# Altium PCB PLC光电隔离模块NPN-16路.PcbDoc
Units mm, origin at the board's own origin, x right, y up, seen from the top; angles counter-clockwise.
Board outline 174.5 x 72.01 mm, 2 copper layers (Top Layer, Bottom Layer); 122 components, 99 nets, 314 pads, 49 vias.
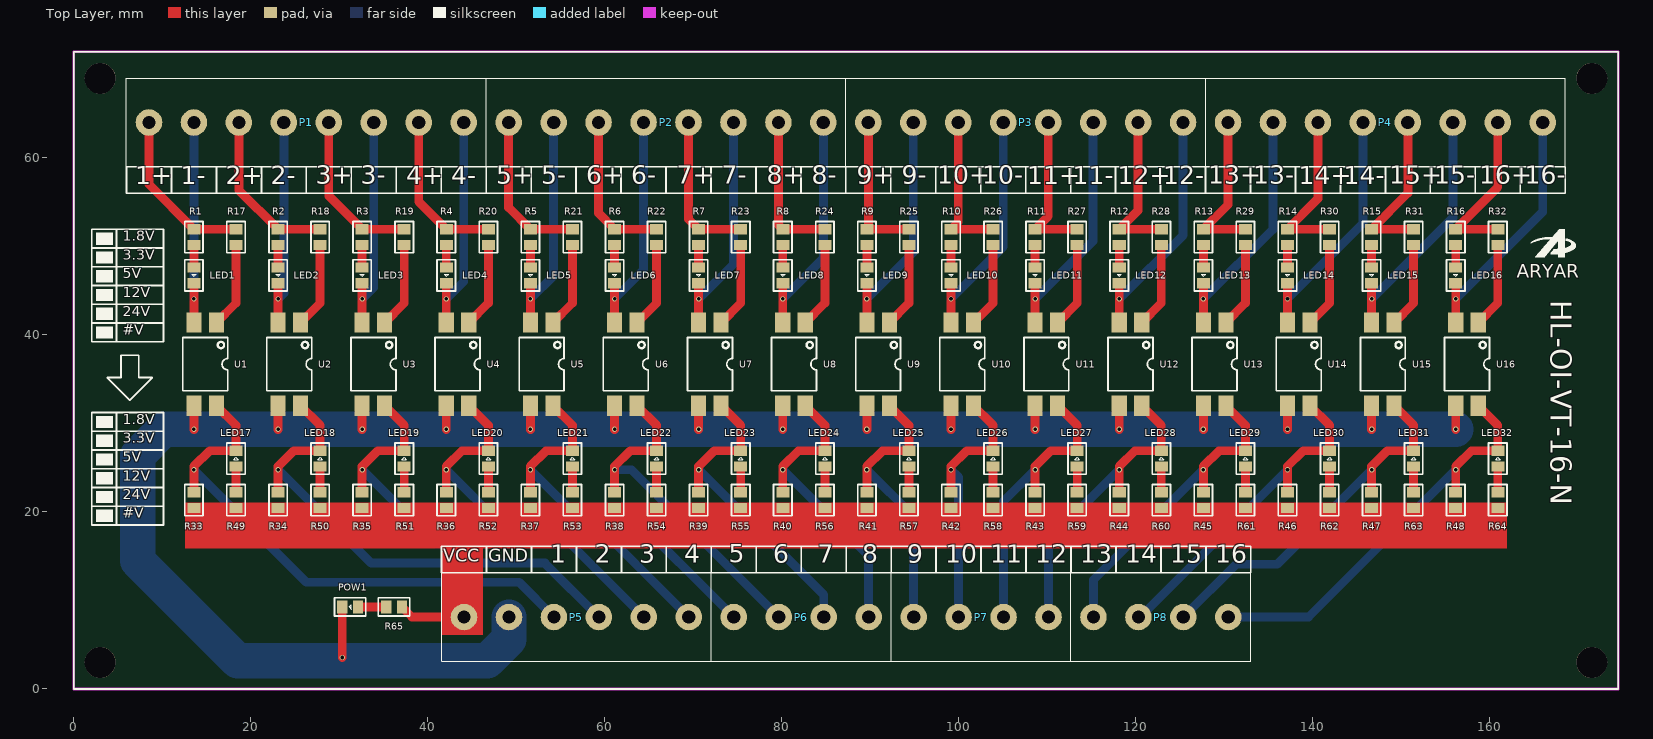
[diagram p0: Top Layer view]
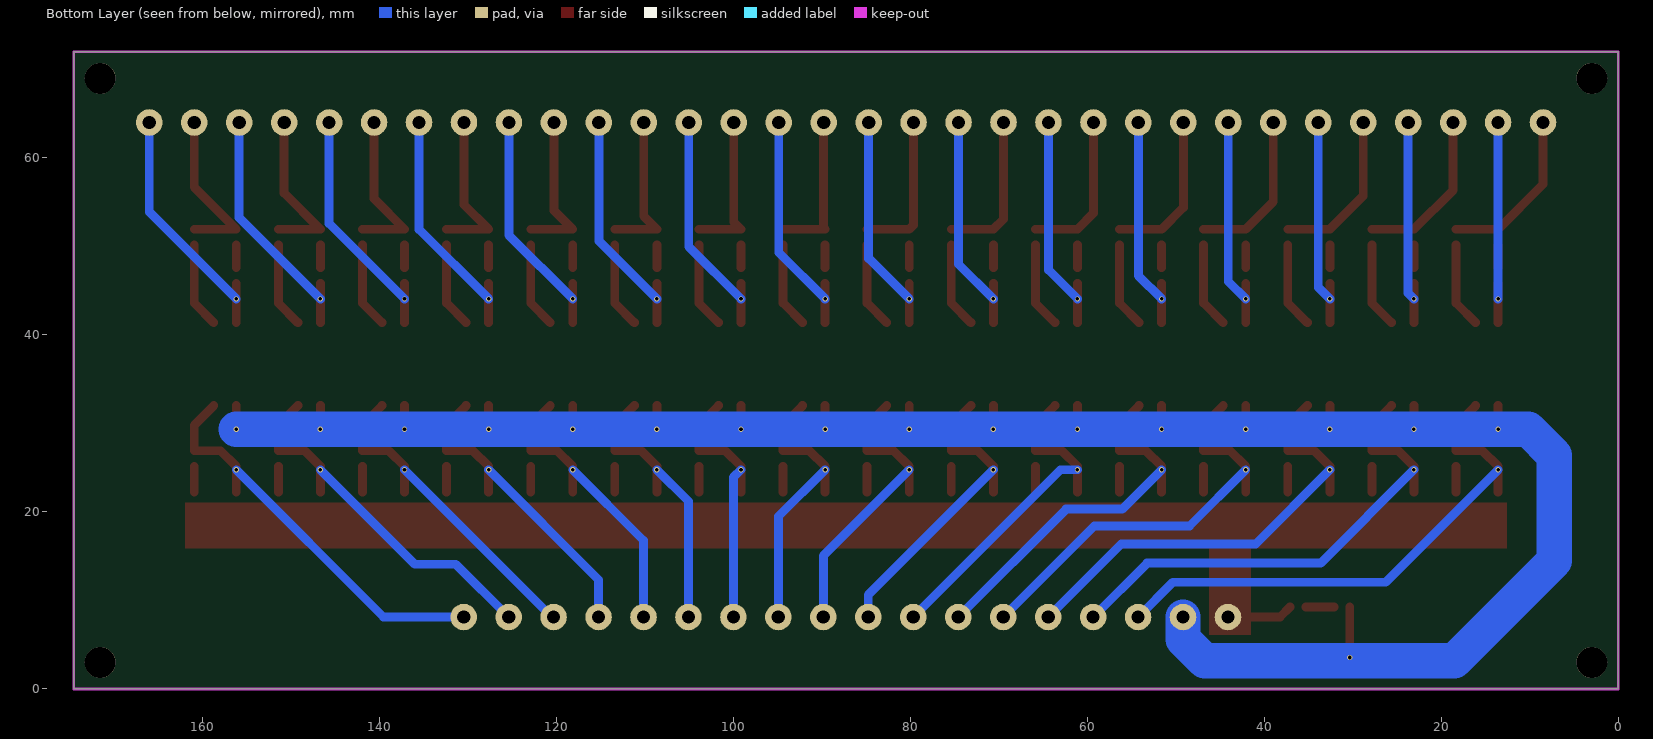
[diagram p1: Bottom Layer view, seen from below]

## Layer stack, top to bottom
Top Solder: solder mask 0.0102, Solder Resist, Dk 3.5
Top Layer: signal copper 0.0356
Dielectric 1: dielectric 0.32, FR-4, Dk 4.8
Bottom Layer: signal copper 0.0356
Bottom Solder: solder mask 0.0102, Solder Resist, Dk 3.5

## Board outline
0,0 0,72.009 174.498,72.009 174.498,0

## Design rules (kind name [scope] priority, off if disabled: settings)
Clearance [All] p1: gap=0.2
PolygonConnect [All] p1: connectstyle=Relief reliefconductorwidth=0.254 reliefentries=4 polygonreliefangle="90 Angle" airgapwidth=0.254
RoutingVias [All] p1: holewidth=0.6 width=1 viastyle="Through Hole" minholewidth=0.711 minwidth=1.27 maxholewidth=0.711 maxwidth=1.27
SilkToSilkClearance [All] p1: silktosilkclearance=0.001
SilkToSolderMaskClearance [IsPad] p1: minsilkscreentomaskgap=0.001 clearancetoexposedcopper=TRUE
SolderMaskExpansion [All] p1: expansion=0.102
Width [All] p1: maxlimit=4 minlimit=0.2 preferedwidth=1 minimp=50.000000 maximp=50.000000 favimp=50.000000
28 further rules are at their usual default settings.

## Components (designator, comment, footprint, x,y, rotation, side; value= is the part's Value field where it differs from the comment)
LED1 "0805" LC-0805 13.589,46.736 r270 top
LED2 "0805" LC-0805 23.094,46.736 r270 top
LED3 "0805" LC-0805 32.598,46.736 r270 top
LED4 "0805" LC-0805 42.103,46.736 r270 top
LED5 "0805" LC-0805 51.607,46.736 r270 top
LED6 "0805" LC-0805 61.112,46.736 r270 top
LED7 "0805" LC-0805 70.616,46.736 r270 top
LED8 "0805" LC-0805 80.121,46.736 r270 top
LED9 "0805" LC-0805 89.625,46.736 r270 top
LED10 "0805" LC-0805 99.13,46.736 r270 top
LED11 "0805" LC-0805 108.634,46.736 r270 top
LED12 "0805" LC-0805 118.139,46.736 r270 top
LED13 "0805" LC-0805 127.643,46.736 r270 top
LED14 "0805" LC-0805 137.148,46.736 r270 top
LED15 "0805" LC-0805 146.652,46.736 r270 top
LED16 "0805" LC-0805 156.157,46.736 r270 top
LED17 "0805" LC-0805 18.341,26.035 r90 top
LED18 "0805" LC-0805 27.846,26.035 r90 top
LED19 "0805" LC-0805 37.35,26.035 r90 top
LED20 "0805" LC-0805 46.855,26.035 r90 top
LED21 "0805" LC-0805 56.359,26.035 r90 top
LED22 "0805" LC-0805 65.864,26.035 r90 top
LED23 "0805" LC-0805 75.368,26.035 r90 top
LED24 "0805" LC-0805 84.873,26.035 r90 top
LED25 "0805" LC-0805 94.377,26.035 r90 top
LED26 "0805" LC-0805 103.882,26.035 r90 top
LED27 "0805" LC-0805 113.386,26.035 r90 top
LED28 "0805" LC-0805 122.891,26.035 r90 top
LED29 "0805" LC-0805 132.395,26.035 r90 top
LED30 "0805" LC-0805 141.9,26.035 r90 top
LED31 "0805" LC-0805 151.404,26.035 r90 top
LED32 "0805" LC-0805 160.909,26.035 r90 top
P1 "Header 8" 128单排8位端子5.08 8.509,64.008 r0 top
P2 "Header 8" 128单排8位端子5.08 49.149,64.008 r0 top
P3 "Header 8" 128单排8位端子5.08 89.789,64.008 r0 top
P4 "Header 8" 128单排8位端子5.08 130.429,64.008 r0 top
P5 "Header 6" "128单排6位端子5.08 - 反向" 44.105,8.128 r0 top
P6 "Header 4" 128单排4位端子5.08 74.585,8.128 r0 top
P7 "Header 4" 128单排4位端子5.08 94.905,8.128 r0 top
P8 "Header 4" 128单排4位端子5.08 115.225,8.128 r0 top
POW1 "0805" LC-0805 31.242,9.271 r180 top
R1 "330R" LC-0805_L 13.589,51.054 r90 top
R2 "330R" LC-0805_L 23.094,51.054 r90 top
R3 "330R" LC-0805_L 32.598,51.054 r90 top
R4 "330R" LC-0805_L 42.103,51.054 r90 top
R5 "330R" LC-0805_L 51.607,51.054 r90 top
R6 "330R" LC-0805_L 61.112,51.054 r90 top
R7 "330R" LC-0805_L 70.616,51.054 r90 top
R8 "330R" LC-0805_L 80.121,51.054 r90 top
R9 "330R" LC-0805_L 89.625,51.054 r90 top
R10 "330R" LC-0805_L 99.13,51.054 r90 top
R11 "330R" LC-0805_L 108.634,51.054 r90 top
R12 "330R" LC-0805_L 118.139,51.054 r90 top
R13 "330R" LC-0805_L 127.643,51.054 r90 top
R14 "330R" LC-0805_L 137.148,51.054 r90 top
R15 "330R" LC-0805_L 146.652,51.054 r90 top
R16 "330R" LC-0805_L 156.157,51.054 r90 top
R17 "331 0805" LC-0805_L 18.341,51.054 r270 top
R18 "331 0805" LC-0805_L 27.846,51.054 r270 top
R19 "331 0805" LC-0805_L 37.35,51.054 r270 top
R20 "331 0805" LC-0805_L 46.855,51.054 r270 top
R21 "331 0805" LC-0805_L 56.359,51.054 r270 top
R22 "331 0805" LC-0805_L 65.864,51.054 r270 top
R23 "331 0805" LC-0805_L 75.368,51.054 r270 top
R24 "331 0805" LC-0805_L 84.873,51.054 r270 top
R25 "331 0805" LC-0805_L 94.377,51.054 r270 top
R26 "331 0805" LC-0805_L 103.882,51.054 r270 top
R27 "331 0805" LC-0805_L 113.386,51.054 r270 top
R28 "331 0805" LC-0805_L 122.891,51.054 r270 top
R29 "331 0805" LC-0805_L 132.395,51.054 r270 top
R30 "331 0805" LC-0805_L 141.9,51.054 r270 top
R31 "331 0805" LC-0805_L 151.404,51.054 r270 top
R32 "331 0805" LC-0805_L 160.909,51.054 r270 top
R33 "10K 0805" LC-0805_L 13.589,21.336 r270 top
R34 "10K 0805" LC-0805_L 23.094,21.336 r270 top
R35 "10K 0805" LC-0805_L 32.598,21.336 r270 top
R36 "10K 0805" LC-0805_L 42.103,21.336 r270 top
R37 "10K 0805" LC-0805_L 51.607,21.336 r270 top
R38 "10K 0805" LC-0805_L 61.112,21.336 r270 top
R39 "10K 0805" LC-0805_L 70.616,21.336 r270 top
R40 "10K 0805" LC-0805_L 80.121,21.336 r270 top
R41 "10K 0805" LC-0805_L 89.625,21.336 r270 top
R42 "10K 0805" LC-0805_L 99.13,21.336 r270 top
R43 "10K 0805" LC-0805_L 108.634,21.336 r270 top
R44 "10K 0805" LC-0805_L 118.139,21.336 r270 top
R45 "10K 0805" LC-0805_L 127.643,21.336 r270 top
R46 "10K 0805" LC-0805_L 137.148,21.336 r270 top
R47 "10K 0805" LC-0805_L 146.652,21.336 r270 top
R48 "10K 0805" LC-0805_L 156.157,21.336 r270 top
R49 "510R" LC-0805_L 18.341,21.336 r90 top
R50 "510R" LC-0805_L 27.846,21.336 r90 top
R51 "510R" LC-0805_L 37.35,21.336 r90 top
R52 "510R" LC-0805_L 46.855,21.336 r90 top
R53 "510R" LC-0805_L 56.359,21.336 r90 top
R54 "510R" LC-0805_L 65.864,21.336 r90 top
R55 "510R" LC-0805_L 75.368,21.336 r90 top
R56 "510R" LC-0805_L 84.873,21.336 r90 top
R57 "510R" LC-0805_L 94.377,21.336 r90 top
R58 "510R" LC-0805_L 103.882,21.336 r90 top
R59 "510R" LC-0805_L 113.386,21.336 r90 top
R60 "510R" LC-0805_L 122.891,21.336 r90 top
R61 "510R" LC-0805_L 132.395,21.336 r90 top
R62 "510R" LC-0805_L 141.9,21.336 r90 top
R63 "510R" LC-0805_L 151.404,21.336 r90 top
R64 "510R" LC-0805_L 160.909,21.336 r90 top
R65 "510R 0805" LC-0805_L 36.195,9.271 r0 top
U1 "EL817" EL817 16.129,41.402 r270 top
U2 "EL817" EL817 25.634,41.402 r270 top
U3 "EL817" EL817 35.138,41.402 r270 top
U4 "EL817" EL817 44.643,41.402 r270 top
U5 "EL817" EL817 54.147,41.402 r270 top
U6 "EL817" EL817 63.652,41.402 r270 top
U7 "EL817" EL817 73.156,41.402 r270 top
U8 "EL817" EL817 82.661,41.402 r270 top
U9 "EL817" EL817 92.165,41.402 r270 top
U10 "EL817" EL817 101.67,41.402 r270 top
U11 "EL817" EL817 111.174,41.402 r270 top
U12 "EL817" EL817 120.679,41.402 r270 top
U13 "EL817" EL817 130.183,41.402 r270 top
U14 "EL817" EL817 139.688,41.402 r270 top
U15 "EL817" EL817 149.192,41.402 r270 top
U16 "EL817" EL817 158.697,41.402 r270 top

## Footprints (in the part's own frame and the unit in brackets; to place one, negate y for a bottom-side part, rotate by r counter-clockwise, add the part's x,y. Pads: shape width x height; smd on the part's side, far side on the other; paste and mask are expansions set on the pad)
128单排4位端子5.08 [mm]
  round 3 hole 1.5: 1(0,0) 2(5.08,0) 3(10.16,0) 4(15.24,0)
  silkscreen extent -2.54,-5 17.78,5
"128单排6位端子5.08 - 反向" [mm]
  round 3 hole 1.5: 1(0,0) 2(5.08,0) 3(10.16,0) 4(15.24,0) 5(20.32,0) 6(25.4,0)
  silkscreen extent -2.54,-5 27.94,5
128单排8位端子5.08 [mm]
  round 3 hole 1.5: 1(0,0) 2(5.08,0) 3(10.16,0) 4(15.24,0) 5(20.32,0) 6(25.4,0) 7(30.48,0) 8(35.56,0)
  silkscreen extent -2.54,-5 38.1,5
EL817 [mm]
  rect 2.3x1.71 smd: 1(0,0) 2(0,-2.54) 3(9.39,-2.54) 4(9.39,0)
  silkscreen extent 1.67,-3.81 7.72,1.27
LC-0805 [mm]
  rect 1.16x1.47 smd: 1(-0.89,0) 2(0.89,0)
  silkscreen extent -1.77,-1.03 1.77,1.04, body extent -1.02,-0.64 1.03,0.64, height 0.6
LC-0805_L [mm]
  rect 1.16x1.47 smd: 1(-0.89,0) 2(0.89,0)
  silkscreen extent -1.77,-1.03 1.77,1.04, body extent -1.02,-0.64 1.03,0.64, height 0.6

## Part data
LED1 LED2 LED3 LED4 LED5 LED6 LED7 LED8 LED9 LED10 LED11 LED12 LED13 LED14 LED15 LED16 LED17 LED18 LED19 LED20 LED21 LED22 LED23 LED24 LED25 LED26 LED27 LED28 LED29 LED30 LED31 LED32 POW1: library part LED0, "Typical INFRARED GaAs LED"
P1 P2 P3 P4: "Header, 8-Pin"
P5: "Header, 6-Pin"
P6 P7 P8: "Header, 4-Pin"
R1 R2 R3 R4 R5 R6 R7 R8 R9 R10 R11 R12 R13 R14 R15 R16 R17 R18 R19 R20 R21 R22 R23 R24 R25 R26 R27 R28 R29 R30 R31 R32 R33 R34 R35 R36 R37 R38 R39 R40 R41 R42 R43 R44 R45 R46 R47 R48 R49 R50 R51 R52 R53 R54 R55 R56 R57 R58 R59 R60 R61 R62 R63 R64 R65: library part Res2, "Resistor"

## Free pads (board coordinates)
  round 3.5 hole 3.5 unplated: ""(3,3) ""(3,69) ""(171.529,3) ""(171.529,69)

## Via types
v1: diameter 0.6, hole 0.4, Top Layer to Bottom Layer, 49 vias

## Nets (pads, with @x,y where several pads share a name; then routed paths per layer and width w, separated by ;. In a path a pad name is that pad's centre, name@x,y a point inside that pad or via, vN(x,y) a via of type N, cw(c..) or ccw(c..) an arc to the next point about the centre after c; other vN are vias at no path point)
GND: P5.2 POW1.2 U1.3 U2.3 U3.3 U4.3 U5.3 U6.3 U7.3 U8.3 U9.3 U10.3 U11.3 U12.3 U13.3 U14.3 U15.3 U16.3 | length 260.7
  Top Layer w1: v1(13.589,29.337) U1.3 ; v1(23.094,29.337) U2.3 ; POW1.2 v1(30.353,3.556) ; v1(32.598,29.337) U3.3 ; v1(42.103,29.337) U4.3 ; v1(51.607,29.337) U5.3 ; v1(61.112,29.337) U6.3 ; v1(70.616,29.337) U7.3 ; v1(80.121,29.337) U8.3 ; v1(89.625,29.337) U9.3 ; v1(99.13,29.337) U10.3 ; v1(108.634,29.337) U11.3 ; v1(118.139,29.337) U12.3 ; v1(127.643,29.337) U13.3 ; v1(137.148,29.337) U14.3 ; v1(146.652,29.337) U15.3 ; v1(156.157,29.337) U16.3
  Bottom Layer w4: P5.2 49.185,5.624 46.736,3.175 18.542,3.175 7.239,14.478 7.239,26.416 10.16,29.337 v1(13.589,29.337) v1(23.094,29.337) v1(32.598,29.337) v1(42.103,29.337) v1(51.607,29.337) v1(61.112,29.337) v1(70.616,29.337) v1(80.121,29.337) v1(89.625,29.337) v1(99.13,29.337) v1(108.634,29.337) v1(118.139,29.337) v1(127.643,29.337) v1(137.148,29.337) v1(146.652,29.337) v1(156.157,29.337)
NetLED1_1: LED1.1 R1.1 | length 2.5
  Top Layer w1: LED1.1 R1.1
NetLED1_2: LED1.2 P1.2 U1.2 | length 24.4
  Top Layer w1: U1.2 LED1.2
  Bottom Layer w1: v1(13.589,44.069) P1.2
NetLED2_1: LED2.1 R2.1 | length 2.5
  Top Layer w1: LED2.1 R2.1
NetLED2_2: LED2.2 P1.4 U2.2 | length 24.7
  Top Layer w1: U2.2 LED2.2
  Bottom Layer w1: v1(23.094,44.069) 23.749,44.724 P1.4
NetLED3_1: LED3.1 R3.1 | length 2.5
  Top Layer w1: LED3.1 R3.1
NetLED3_2: LED3.2 P1.6 U3.2 | length 24.9
  Top Layer w1: U3.2 LED3.2
  Bottom Layer w1: v1(32.598,44.069) 33.909,45.38 P1.6
NetLED4_1: LED4.1 R4.1 | length 2.5
  Top Layer w1: LED4.1 R4.1
NetLED4_2: LED4.2 P1.8 U4.2 | length 25.2
  Top Layer w1: U4.2 LED4.2
  Bottom Layer w1: v1(42.103,44.069) 44.069,46.035 P1.8
NetLED5_1: LED5.1 R5.1 | length 2.5
  Top Layer w1: LED5.1 R5.1
NetLED5_2: LED5.2 P2.2 U5.2 | length 25.5
  Top Layer w1: U5.2 LED5.2
  Bottom Layer w1: v1(51.607,44.069) 54.229,46.691 P2.2
NetLED6_1: LED6.1 R6.1 | length 2.5
  Top Layer w1: LED6.1 R6.1
NetLED6_2: LED6.2 P2.4 U6.2 | length 25.7
  Top Layer w1: U6.2 LED6.2
  Bottom Layer w1: v1(61.112,44.069) 64.389,47.346 P2.4
NetLED7_1: LED7.1 R7.1 | length 2.5
  Top Layer w1: LED7.1 R7.1
NetLED7_2: LED7.2 P2.6 U7.2 | length 26
  Top Layer w1: U7.2 LED7.2
  Bottom Layer w1: v1(70.616,44.069) 74.549,48.002 P2.6
NetLED8_1: LED8.1 R8.1 | length 2.5
  Top Layer w1: LED8.1 R8.1
NetLED8_2: LED8.2 P2.8 U8.2 | length 26.3
  Top Layer w1: U8.2 LED8.2
  Bottom Layer w1: v1(80.121,44.069) 84.709,48.657 P2.8
NetLED9_1: LED9.1 R9.1 | length 2.5
  Top Layer w1: LED9.1 R9.1
NetLED9_2: LED9.2 P3.2 U9.2 | length 26.6
  Top Layer w1: U9.2 LED9.2
  Bottom Layer w1: v1(89.625,44.069) 94.869,49.313 P3.2
NetLED10_1: LED10.1 R10.1 | length 2.5
  Top Layer w1: LED10.1 R10.1
NetLED10_2: LED10.2 P3.4 U10.2 | length 26.8
  Top Layer w1: U10.2 LED10.2
  Bottom Layer w1: v1(99.13,44.069) 105.029,49.968 P3.4
NetLED11_1: LED11.1 R11.1 | length 2.5
  Top Layer w1: LED11.1 R11.1
NetLED11_2: LED11.2 P3.6 U11.2 | length 27.1
  Top Layer w1: U11.2 LED11.2
  Bottom Layer w1: v1(108.634,44.069) 115.189,50.624 P3.6
NetLED12_1: LED12.1 R12.1 | length 2.5
  Top Layer w1: LED12.1 R12.1
NetLED12_2: LED12.2 P3.8 U12.2 | length 27.4
  Top Layer w1: U12.2 LED12.2
  Bottom Layer w1: v1(118.139,44.069) 125.349,51.279 P3.8
NetLED13_1: LED13.1 R13.1 | length 2.5
  Top Layer w1: LED13.1 R13.1
NetLED13_2: LED13.2 P4.2 U13.2 | length 27.6
  Top Layer w1: U13.2 LED13.2
  Bottom Layer w1: v1(127.643,44.069) 135.509,51.935 P4.2
NetLED14_1: LED14.1 R14.1 | length 2.5
  Top Layer w1: LED14.1 R14.1
NetLED14_2: LED14.2 P4.4 U14.2 | length 27.9
  Top Layer w1: U14.2 LED14.2
  Bottom Layer w1: v1(137.148,44.069) 145.669,52.59 P4.4
NetLED15_1: LED15.1 R15.1 | length 2.5
  Top Layer w1: LED15.1 R15.1
NetLED15_2: LED15.2 P4.6 U15.2 | length 28.2
  Top Layer w1: U15.2 LED15.2
  Bottom Layer w1: v1(146.652,44.069) 155.829,53.246 P4.6
NetLED16_1: LED16.1 R16.1 | length 2.5
  Top Layer w1: LED16.1 R16.1
NetLED16_2: LED16.2 P4.8 U16.2 | length 28.5
  Top Layer w1: U16.2 LED16.2
  Bottom Layer w1: v1(156.157,44.069) 165.989,53.901 P4.8
NetLED17_1: LED17.1 R49.2 | length 2.9
  Top Layer w1: R49.2 LED17.1
NetLED17_2: LED17.2 P5.3 R33.1 U1.4 | length 62
  Top Layer w1: R33.1 v1(13.589,24.765) 13.589,25.146 15.368,26.925 LED17.2 18.341,29.8 U1.4
  Bottom Layer w1: v1(13.589,24.765) 26.289,12.065 50.328,12.065 P5.3
NetLED18_1: LED18.1 R50.2 | length 2.9
  Top Layer w1: R50.2 LED18.1
NetLED18_2: LED18.2 P5.4 R34.1 U2.4 | length 57.6
  Top Layer w1: R34.1 v1(23.094,24.765) 23.094,25.146 24.873,26.925 LED18.2 27.846,29.8 U2.4
  Bottom Layer w1: v1(23.094,24.765) 33.635,14.224 53.249,14.224 P5.4
NetLED19_1: LED19.1 R51.2 | length 2.9
  Top Layer w1: R51.2 LED19.1
NetLED19_2: LED19.2 P5.5 R35.1 U3.4 | length 53.1
  Top Layer w1: R35.1 v1(32.598,24.765) 32.598,25.146 34.377,26.925 LED19.2 37.35,29.8 U3.4
  Bottom Layer w1: v1(32.598,24.765) 40.98,16.383 56.17,16.383 P5.5
NetLED20_1: LED20.1 R52.2 | length 2.9
  Top Layer w1: R52.2 LED20.1
NetLED20_2: LED20.2 P5.6 R36.1 U4.4 | length 48.7
  Top Layer w1: R36.1 v1(42.103,24.765) 42.103,25.146 43.882,26.925 LED20.2 46.855,29.8 U4.4
  Bottom Layer w1: v1(42.103,24.765) 48.453,18.415 59.218,18.415 P5.6
NetLED21_1: LED21.1 R53.2 | length 2.9
  Top Layer w1: R53.2 LED21.1
NetLED21_2: LED21.2 P6.1 R37.1 U5.4 | length 44.3
  Top Layer w1: R37.1 v1(51.607,24.765) 51.607,25.146 53.386,26.925 LED21.2 56.359,29.8 U5.4
  Bottom Layer w1: v1(51.607,24.765) 56.052,20.32 62.393,20.32 P6.1
NetLED22_1: LED22.1 R54.2 | length 2.9
  Top Layer w1: R54.2 LED22.1
NetLED22_2: LED22.2 P6.2 R38.1 U6.4 | length 39.9
  Top Layer w1: R38.1 v1(61.112,24.765) 61.112,25.146 62.891,26.925 LED22.2 65.864,29.8 U6.4
  Bottom Layer w1: v1(61.112,24.765) 63.028,24.765 P6.2
NetLED23_1: LED23.1 R55.2 | length 2.9
  Top Layer w1: R55.2 LED23.1
NetLED23_2: LED23.2 P6.3 R39.1 U7.4 | length 36.9
  Top Layer w1: R39.1 v1(70.616,24.765) 70.616,25.146 72.395,26.925 LED23.2 75.368,29.8 U7.4
  Bottom Layer w1: v1(70.616,24.765) 84.745,10.636 P6.3
NetLED24_1: LED24.1 R56.2 | length 2.9
  Top Layer w1: R56.2 LED24.1
NetLED24_2: LED24.2 P6.4 R40.1 U8.4 | length 35.1
  Top Layer w1: R40.1 v1(80.121,24.765) 80.121,25.146 81.9,26.925 LED24.2 84.873,29.8 U8.4
  Bottom Layer w1: v1(80.121,24.765) 89.825,15.061 P6.4
NetLED25_1: LED25.1 R57.2 | length 2.9
  Top Layer w1: R57.2 LED25.1
NetLED25_2: LED25.2 P7.1 R41.1 U9.4 | length 33.2
  Top Layer w1: R41.1 v1(89.625,24.765) 89.625,25.146 91.404,26.925 LED25.2 94.377,29.8 U9.4
  Bottom Layer w1: v1(89.625,24.765) 94.905,19.485 P7.1
NetLED26_1: LED26.1 R58.2 | length 2.9
  Top Layer w1: R58.2 LED26.1
NetLED26_2: LED26.2 P7.2 R42.1 U10.4 | length 31.4
  Top Layer w1: R42.1 v1(99.13,24.765) 99.13,25.146 100.909,26.925 LED26.2 103.882,29.8 U10.4
  Bottom Layer w1: v1(99.13,24.765) 99.985,23.91 P7.2
NetLED27_1: LED27.1 R59.2 | length 2.9
  Top Layer w1: R59.2 LED27.1
NetLED27_2: LED27.2 P7.3 R43.1 U11.4 | length 32.5
  Top Layer w1: R43.1 v1(108.634,24.765) 108.634,25.146 110.413,26.925 LED27.2 113.386,29.8 U11.4
  Bottom Layer w1: P7.3 105.065,21.196 v1(108.634,24.765)
NetLED28_1: LED28.1 R60.2 | length 2.9
  Top Layer w1: R60.2 LED28.1
NetLED28_2: LED28.2 P7.4 R44.1 U12.4 | length 34.4
  Top Layer w1: R44.1 v1(118.139,24.765) 118.139,25.146 119.918,26.925 LED28.2 122.891,29.8 U12.4
  Bottom Layer w1: P7.4 110.145,16.771 v1(118.139,24.765)
NetLED29_1: LED29.1 R61.2 | length 2.9
  Top Layer w1: R61.2 LED29.1
NetLED29_2: LED29.2 P8.1 R45.1 U13.4 | length 36.2
  Top Layer w1: R45.1 v1(127.643,24.765) 127.643,25.146 129.422,26.925 LED29.2 132.395,29.8 U13.4
  Bottom Layer w1: P8.1 115.225,12.347 v1(127.643,24.765)
NetLED30_1: LED30.1 R62.2 | length 2.9
  Top Layer w1: R62.2 LED30.1
NetLED30_2: LED30.2 P8.2 R46.1 U14.4 | length 38.1
  Top Layer w1: R46.1 v1(137.148,24.765) 137.148,25.146 138.927,26.925 LED30.2 141.9,29.8 U14.4
  Bottom Layer w1: P8.2 120.511,8.128 v1(137.148,24.765)
NetLED31_1: LED31.1 R63.2 | length 2.9
  Top Layer w1: R63.2 LED31.1
NetLED31_2: LED31.2 P8.3 R47.1 U15.4 | length 42.6
  Top Layer w1: R47.1 v1(146.652,24.765) 146.652,25.146 148.431,26.925 LED31.2 151.404,29.8 U15.4
  Bottom Layer w1: P8.3 131.354,14.097 135.984,14.097 v1(146.652,24.765)
NetLED32_1: LED32.1 R64.2 | length 2.9
  Top Layer w1: R64.2 LED32.1
NetLED32_2: LED32.2 P8.4 R48.1 U16.4 | length 47
  Top Layer w1: R48.1 v1(156.157,24.765) 156.157,25.146 157.936,26.925 LED32.2 160.909,29.8 U16.4
  Bottom Layer w1: P8.4 139.52,8.128 v1(156.157,24.765)
NetP1_1: P1.1 R1.2 R17.1 | length 18.9
  Top Layer w1: P1.1 8.509,57.024 R1.2 R17.1
NetP1_3: P1.3 R2.2 R18.1 | length 18.6
  Top Layer w1: P1.3 18.669,56.369 R2.2 R18.1
NetP1_5: P1.5 R3.2 R19.1 | length 18.4
  Top Layer w1: P1.5 28.829,55.713 R3.2 R19.1
NetP1_7: P1.7 R4.2 R20.1 | length 18.1
  Top Layer w1: P1.7 38.989,55.058 R4.2 R20.1
NetP2_1: P2.1 R5.2 R21.1 | length 17.8
  Top Layer w1: P2.1 49.149,54.402 R5.2 R21.1
NetP2_3: P2.3 R6.2 R22.1 | length 17.6
  Top Layer w1: P2.3 59.309,53.747 R6.2 R22.1
NetP2_5: P2.5 R7.2 R23.1 | length 17.3
  Top Layer w1: P2.5 69.469,53.091 R7.2 R23.1
NetP2_7: P2.7 R8.2 R24.1 | length 17
  Top Layer w1: P2.7 79.629,52.436 R8.2 R24.1
NetP3_1: P3.1 R9.2 R25.1 | length 16.9
  Top Layer w1: P3.1 89.789,52.108 R9.2 R25.1
NetP3_3: P3.3 R10.2 R26.1 | length 17.2
  Top Layer w1: P3.3 99.949,52.763 R10.2 R26.1
NetP3_5: P3.5 R11.2 R27.1 | length 17.4
  Top Layer w1: P3.5 110.109,53.419 R11.2 R27.1
NetP3_7: P3.7 R12.2 R28.1 | length 17.7
  Top Layer w1: P3.7 120.269,54.074 R12.2 R28.1
NetP4_1: P4.1 R13.2 R29.1 | length 18
  Top Layer w1: P4.1 130.429,54.73 R13.2 R29.1
NetP4_3: P4.3 R14.2 R30.1 | length 18.2
  Top Layer w1: P4.3 140.589,55.385 R14.2 R30.1
NetP4_5: P4.5 R15.2 R31.1 | length 18.5
  Top Layer w1: P4.5 150.749,56.041 R15.2 R31.1
NetP4_7: P4.7 R16.2 R32.1 | length 18.8
  Top Layer w1: R32.1 R16.2 160.909,56.696 P4.7
NetPOW1_1: POW1.1 R65.1 | length 3.2
  Top Layer w1: POW1.1 R65.1
NetR17_2: R17.2 U1.1 | length 9.7
  Top Layer w1: U1.1 18.341,43.614 R17.2
NetR18_2: R18.2 U2.1 | length 9.7
  Top Layer w1: U2.1 27.846,43.614 R18.2
NetR19_2: R19.2 U3.1 | length 9.7
  Top Layer w1: U3.1 37.35,43.614 R19.2
NetR20_2: R20.2 U4.1 | length 9.7
  Top Layer w1: U4.1 46.855,43.614 R20.2
NetR21_2: R21.2 U5.1 | length 9.7
  Top Layer w1: U5.1 56.359,43.614 R21.2
NetR22_2: R22.2 U6.1 | length 9.7
  Top Layer w1: U6.1 65.864,43.614 R22.2
NetR23_2: R23.2 U7.1 | length 9.7
  Top Layer w1: U7.1 75.368,43.614 R23.2
NetR24_2: R24.2 U8.1 | length 9.7
  Top Layer w1: U8.1 84.873,43.614 R24.2
NetR25_2: R25.2 U9.1 | length 9.7
  Top Layer w1: U9.1 94.377,43.614 R25.2
NetR26_2: R26.2 U10.1 | length 9.7
  Top Layer w1: U10.1 103.882,43.614 R26.2
NetR27_2: R27.2 U11.1 | length 9.7
  Top Layer w1: U11.1 113.386,43.614 R27.2
NetR28_2: R28.2 U12.1 | length 9.7
  Top Layer w1: U12.1 122.891,43.614 R28.2
NetR29_2: R29.2 U13.1 | length 9.7
  Top Layer w1: U13.1 132.395,43.614 R29.2
NetR30_2: R30.2 U14.1 | length 9.7
  Top Layer w1: U14.1 141.9,43.614 R30.2
NetR31_2: R31.2 U15.1 | length 9.7
  Top Layer w1: U15.1 151.404,43.614 R31.2
NetR32_2: R32.2 U16.1 | length 9.7
  Top Layer w1: U16.1 160.909,43.614 R32.2
VCC: P5.1 R33.2 R34.2 R35.2 R36.2 R37.2 R38.2 R39.2 R40.2 R41.2 R42.2 R43.2 R44.2 R45.2 R46.2 R47.2 R48.2 R49.1 R50.1 R51.1 R52.1 R53.1 R54.1 R55.1 R56.1 R57.1 R58.1 R59.1 R60.1 R61.1 R62.1 R63.1 R64.1 R65.2 | length 7.5
  Top Layer w1: R65.2 38.228,8.128 P5.1

## Keep-outs
Keep-Out Layer:
  lines w0.3: 0,0 174.529,0 174.529,72 0,72 0,0

## Other copper
Top Layer:
  rectangle net VCC: 12.573,15.875 161.925,21.082
  rectangle net VCC: 41.529,6.096 46.228,16.891

## Silkscreen, mask and mechanical layers (free items; w line width, h text height)
Top Overlay:
  drawing of 508 lines, arcs and shapes, not listed
  text "5+" at 47.739,56.41 h3.5
  text "5-" at 52.834,56.41 h3.5
  text "3+" at 27.361,56.388 h3.5
  text "3-" at 32.455,56.388 h3.5
  text "4+" at 37.55,56.376 h3.5
  text "4-" at 42.645,56.376 h3.5
  text "6+" at 57.929,56.388 h3.5
  text "6-" at 63.023,56.388 h3.5
  text "7+" at 68.118,56.388 h3.5
  text "7-" at 73.213,56.388 h3.5
  text "8+" at 78.307,56.388 h3.5
  text "8-" at 83.402,56.388 h3.5
  text "9+" at 88.497,56.388 h3.5
  text "9-" at 93.591,56.388 h3.5
  text "10+" at 97.551,56.388 h3.5
  text "10-" at 102.658,56.388 h3.5
  text "13+" at 128.195,56.388 h3.5
  text "13-" at 133.302,56.388 h3.5
  text "15+" at 148.624,56.388 h3.5
  text "15-" at 153.731,56.388 h3.5
  text "16+" at 158.839,56.388 h3.5
  text "16-" at 163.946,56.388 h3.5
  text "1+" at 6.982,56.369 h3.5
  text "1-" at 12.077,56.369 h3.5
  text "2+" at 17.168,56.369 h3.5
  text "2-" at 22.263,56.369 h3.5
  text "11+" at 107.765,56.369 h3.5
  text "11-" at 112.873,56.369 h3.5
  text "12+" at 117.98,56.369 h3.5
  text "12-" at 123.087,56.369 h3.5
  text "14+" at 138.409,56.369 h3.5
  text "14-" at 143.517,56.369 h3.5
  text "1.8V" at 5.529,50.23 h2
  text "3.3V" at 5.529,48.112 h2
  text "5V" at 5.529,45.994 h2
  text "ARYAR" at 163.069,45.974 h2.65
  text "HL-OI-VT-16-N" at 166.116,43.942 h4 r270
  text "12V" at 5.529,43.854 h2
  text "24V" at 5.527,41.736 h2
  text "#V" at 5.529,39.639 h2
  text "1.8V" at 5.529,29.529 h2
  text "3.3V" at 5.529,27.411 h2
  text "5V" at 5.529,25.293 h2
  text "12V" at 5.529,23.153 h2
  text "24V" at 5.527,21.035 h2
  text "#V" at 5.529,18.938 h2
  text "VCC" at 41.783,13.843 h2.5
  text "GND" at 46.863,13.843 h2.5
  text "5" at 74.009,13.63 h3.5
  text "3" at 63.93,13.608 h3.5
  text "6" at 79.049,13.608 h3.5
  text "7" at 84.088,13.608 h3.5
  text "8" at 89.128,13.608 h3.5
  text "9" at 94.167,13.608 h3.5
  text "10" at 98.489,13.608 h3.5
  text "13" at 113.727,13.608 h3.5
  text "15" at 123.886,13.608 h3.5
  text "16" at 128.965,13.608 h3.5
  text "1" at 53.852,13.589 h3.5
  text "2" at 58.888,13.589 h3.5
  text "4" at 68.97,13.596 h3.5
  text "11" at 103.568,13.589 h3.5
  text "12" at 108.648,13.589 h3.5
  text "14" at 118.806,13.589 h3.5

## Dimensions
0,0 to 174.529,0 on Mechanical 1
0,0 to 0,72 on Mechanical 1